# Altium PCB PCB final.PcbDoc
Units mm, origin at the board's own origin, x right, y up, seen from the top; angles counter-clockwise.
Board outline 152.4 x 101.6 mm, 2 copper layers (Top Layer, Bottom Layer); 40 components, 30 nets, 161 pads, 0 vias.
Unrouted connection lines stored in the file: 32.
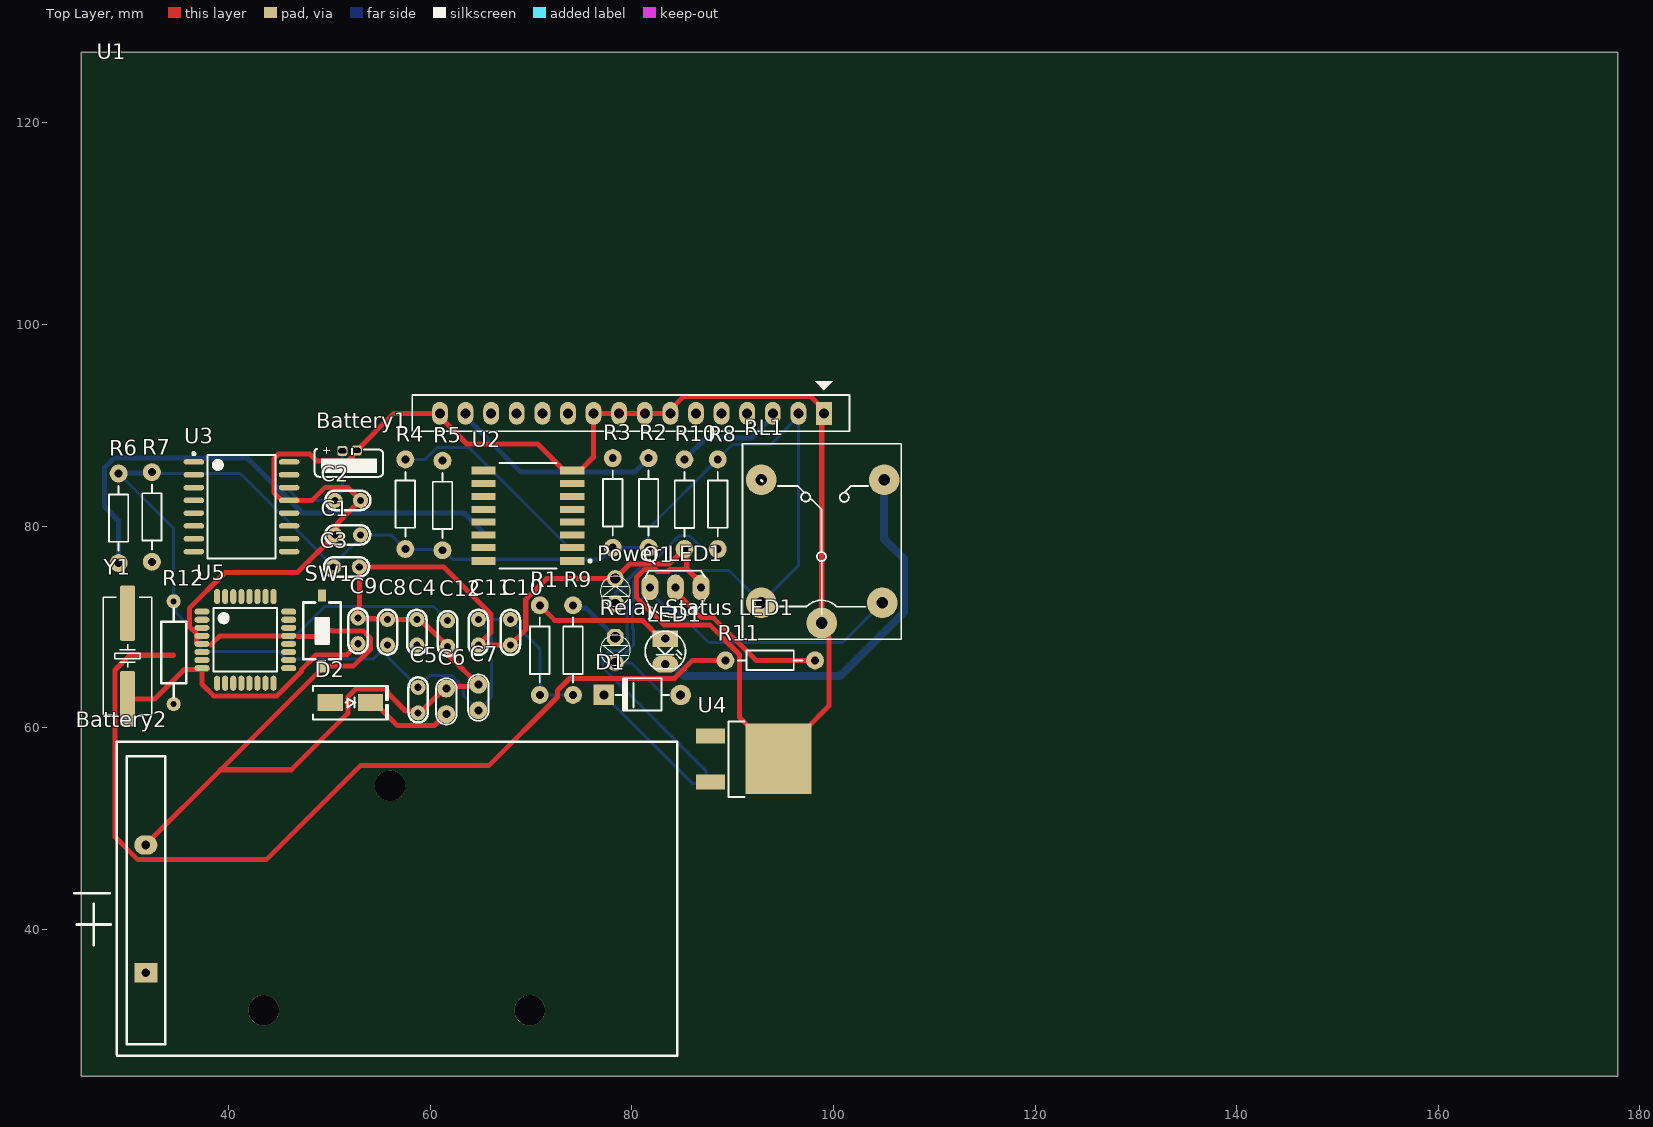
[diagram p0: Top Layer view]
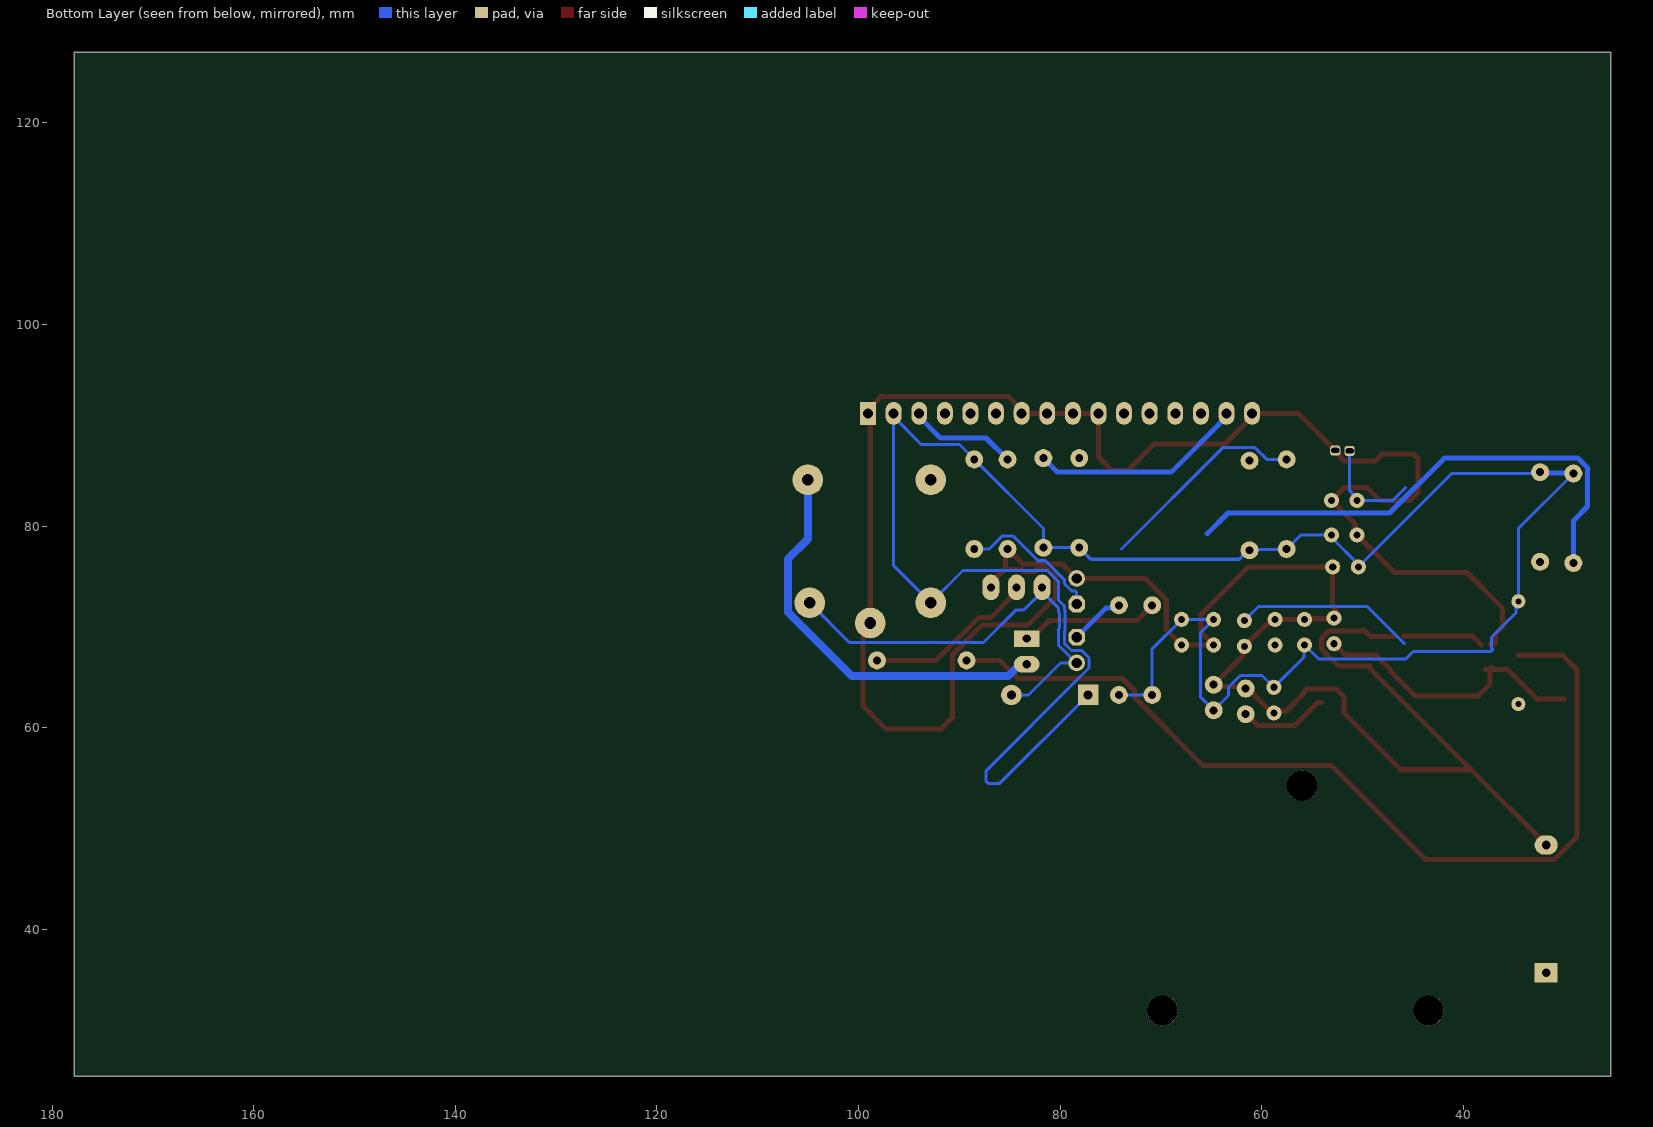
[diagram p1: Bottom Layer view, seen from below]

## Layer stack, top to bottom
Top Solder: solder mask 0.0102, Solder Resist, Dk 3.5
Top Layer: signal copper 0.0356
Dielectric 1: dielectric 0.32, FR-4, Dk 4.8
Bottom Layer: signal copper 0.0356
Bottom Solder: solder mask 0.0102, Solder Resist, Dk 3.5

## Board outline
25.4,25.4 177.8,25.4 177.8,127 25.4,127

## Design rules (kind name [scope] priority, off if disabled: settings)
Clearance [All] p1: gap=0.254 ignorepadtopadclearanceinfootprint=FALSE
PolygonConnect [All] p1: connectstyle=Relief reliefconductorwidth=0.254 reliefentries=4 polygonreliefangle="90 Angle" airgapwidth=0.254
RoutingVias [All] p1: holewidth=0.711 width=1.27 viastyle="Through Hole" minholewidth=0.711 minwidth=1.27 maxholewidth=0.711 maxwidth=1.27
SolderMaskExpansion [All] p1: expansion=0.102 istentingtop=FALSE
SupplyNets "Schematic Supply Nets_1" [InNet('+5')] p1: voltage=0.000
SupplyNets "Schematic Supply Nets" [InNet('GND')] p2: voltage=0.000
Width GND [InNet('GND')] p1: maxlimit=1.6 minlimit=0.5 preferedwidth=1.2
Width Width_1 [All] p2: maxlimit=0.8 minlimit=0.3 preferedwidth=0.5
Width 5V [InNet('+5')] p3: maxlimit=1.6 minlimit=0.5 preferedwidth=1.2
30 further rules are at their usual default settings.

## Components (designator, comment, footprint, x,y, rotation, side; value= is the part's Value field where it differs from the comment)
Battery1 "3V" "PIN 3.6V 20mAh 3/V20H" 51.968,86.639 r90 top value="PIN 3V"
Battery2 "9V" "De Pin 9V" 84.63,58.697 r180 top
C1 "104" "tu gom" 51.816,79.121 r0 top
C2 "104" "tu gom" 51.816,82.55 r180 top
C3 "104" "tu gom" 51.689,75.946 r180 top
C4 "22pF" "tu gom" 58.674,69.469 r90 top
C5 "104" "tu gom" 58.801,62.738 r270 top
C6 "0.33uF" CN1 61.595,63.881 r270 top
C7 "22uF" CN1 64.77,64.262 r270 top
C8 "104" "tu gom" 55.753,69.469 r270 top
C9 "22pF" "tu gom" 52.832,69.596 r270 top
C10 "104" "tu gom" 67.945,69.469 r90 top
C11 "104" "tu gom" 64.77,69.469 r90 top
C12 "104" "tu gom" 61.722,69.342 r90 top
D1 "100v" "DIODE 1A" 86.106,63.246 r0 top
D2 "SS34" "DIODE SMA" 52.07,62.484 r0 top
LED1 "LED 3mm" LED-3MM-WHITE 83.312,68.834 r270 top
"Power LED1" "LED 3mm" LED-3MM-RED 78.359,72.263 r90 top
Q1 "?" TO92 84.328,73.914 r180 top value=C9014
R1 "1k" R1/4W 70.866,72.136 r270 top
R2 "220" R1/4W 81.661,77.851 r90 top
R3 "10k" R1/4W 78.105,77.851 r90 top
R4 "10k" R1/4W 57.531,77.724 r90 top
R5 "10k" R1/4W 61.214,77.597 r90 top
R6 "10k" R1/4W 29.083,76.327 r90 top
R7 "10k" R1/4W 32.385,76.454 r90 top
R8 "1k" R1/4W 88.519,77.724 r90 top
R9 "1k" R1/4W 74.168,72.136 r270 top
R10 "1k" R1/4W 85.217,86.614 r270 top
R11 "1k" R1/4W 98.171,66.675 r180 top
R12 "10k" "tro vach 1/4w" 34.544,67.437 r90 top
"Relay Status LED1" "LED 3mm" LED-3MM-GREEN 78.359,68.961 r270 top
RL1 "Relay" "Relay 5 Chan SRD" 98.837,70.382 r90 top
SW1 "Nut Nhan" "Nut Nhan 2 Chan SMD 3x6x2.5" 49.276,69.596 r90 top
U1 "LCD1602" "LCD1602 with Jump" 99.06,91.186 r180 top
U2 "PCF8574" FP-SOT162-1-MFG 69.678,81.026 r180 top
U3 "DS3231" "SOIC 16" 41.275,81.915 r0 top
U4 "L7805" DPAK_118_446_112X59_SMD 91.821,57.023 r0 top
U5 "ATMEGA328P" TQFP-32 41.656,68.707 r0 top
Y1 "16Mhz" "Thach Anh 2 chan SMD" 29.972,67.115 r90 top value=4Mhz

## Footprints (in the part's own frame and the unit in brackets; to place one, negate y for a bottom-side part, rotate by r counter-clockwise, add the part's x,y. Pads: shape width x height; smd on the part's side, far side on the other; paste and mask are expansions set on the pad)
CN1 [mil]
  round 70 hole 31: 1(0,0) 2(100,0)
  silkscreen extent -40,-40 141,40, body extent -60,-30 170,37, height 265
"De Pin 9V" [mil]
  round 120 hole 120: 0(581.4,1052.4) 0(1126.9,175.9) 0(1620.4,1052.5)
  rect 90x75 hole 34: 1(2080.5,905.75)
  oval 90x75 hole 34: 2(2080.5,407.05)
  silkscreen extent 5,3 2360,1230, body extent 27,20 2173,1210, height 894
"DIODE 1A" [mil] "Diode 1A"
  round 80 hole 35: 1(-50,0)
  rect 80x80 hole 35: 2(-350,0)
  silkscreen extent -305,-61 -95,65, body extent -366,-61 -34,65, height 122
"DIODE SMA" [mm] "SMA"
  rect 2.5x1.7 smd: 1(-2,0) 2(2,0)
  silkscreen extent -3.68,-1.65 3.75,1.65, body extent -2.6,-1.37 2.6,1.37, height 2.4
DPAK_118_446_112X59_SMD [mm] "CASE: DPAK"
  rect 2.85x1.5 smd: 1(-4.023,2.163) 3(-4.023,-2.417)
  rect 6.5x7 smd: 2(2.727,-0.127)
  silkscreen extent -2.22,-3.9 -0.62,3.6, body extent -4.47,-3.43 5.23,3.15, height 2.3
FP-SOT162-1-MFG [mm]
  rect 2.4x0.8 smd paste+0 mask+0: 1(-4.4,4.495) 8(-4.4,-4.495) 9(4.4,-4.495) 16(4.4,4.495)
  rect 2.4x0.7 smd paste+0 mask+0: 2(-4.4,3.175) 3(-4.4,1.905) 4(-4.4,0.635) 5(-4.4,-0.635) 6(-4.4,-1.905) 7(-4.4,-3.175) 10(4.4,-3.175) 11(4.4,-1.905) 12(4.4,-0.635) 13(4.4,0.635) 14(4.4,1.905) 15(4.4,3.175)
  silkscreen extent -6.29,-5.25 2.83,5.25, body extent -5.72,-5.95 5.72,5.95, height 0.25
"LCD1602 with Jump" [mil] "LCD dipslay 16x2, 16 pin"
  rect 62x90 hole 39: 1(0,0)
  oval 62x90 hole 39: 2(100,0) 3(200,0) 4(300,0) 5(400,0) 6(500,0) 7(600,0) 8(700,0) 9(800,0) 10(900,0) 11(1000,0) 12(1100,0) 13(1200,0) 14(1300,0) 15(1400,0) 16(1500,0)
  silkscreen extent -100,-125 1608,70, body extent -320,-1353 2850,84, height 764
LED-3MM-GREEN [mil]
  oct 65x65 hole 40: 1(0,0)
  round 65 hole 40: 2(100,0)
  silkscreen extent -9,-59 109,59, body extent -15,-70 112,60, height 182
LED-3MM-RED [mil]
  oct 65x65 hole 40: 1(0,0)
  round 65 hole 40: 2(100,0)
  silkscreen extent -9,-59 109,59, body extent -27,-77 117,80, height 181
LED-3MM-WHITE [mil] "LED 2 PIN, 3ly Only colour"
  rect 65x100 hole 32: 1(0,0)
  oval 65x100 hole 32: 2(100,0)
  silkscreen extent -29,-78 118,79, body extent -25,-75 113,75, height 217
"Nut Nhan 2 Chan SMD 3x6x2.5" [mm] "Switch SMD type"
  rect 1.2x0.8 smd: 1(-3.5,0) 2(3.5,0)
  silkscreen extent -2.82,-1.85 2.82,1.85, body extent -3.05,-1.85 3.05,1.85, height 2.5
"PIN 3.6V 20mAh 3/V20H" [mm] "batttery"
  rrect50% 1x1 hole 0.5 slot 0.8 at 90 deg unplated: 1(0.813,0.686) 2(0.864,-0.737)
  silkscreen extent -1.75,-3.35 0.99,3.43, body extent -1.74,-3.4 0.96,3.4, height 8.4
R1/4W [mil] "R 1/4W, 2 Pin, 350mil"
  round 70 hole 31: 1(0,0) 2(350,0)
  silkscreen extent 48,-38 302,38, body extent -40,-47 386,47, height 111
"Relay 5 Chan SRD" [mil] "Relay SPDT, 5 pin, 10A,W 650mil, L 800mil, H 800mil"
  round 120 hole 45: 1(0,0) 2(559.06,236.22) 3(559.06,-243.78) 4(78.74,-236.22) 5(78.74,236.22)
  silkscreen extent -63,-311 700,310, body extent -55,-306 697,304, height 602
"SOIC 16" [mm] "SOIC, 16-Leads, Body 10.30x7.50mm, Pitch 1.27mm, IPC Medium Density"
  oval 2.032x0.55 smd: 1(-4.725,4.445) 2(-4.725,3.175) 3(-4.725,1.905) 4(-4.725,0.635) 5(-4.725,-0.635) 6(-4.725,-1.905) 7(-4.725,-3.175) 8(-4.725,-4.445) 9(4.725,-4.445) 10(4.725,-3.175) 11(4.725,-1.905) 12(4.725,-0.635) 13(4.725,0.635) 14(4.725,1.905) 15(4.725,3.175) 16(4.725,4.445)
  silkscreen extent -4.85,-5.15 3.35,5.39, body extent -5.15,-5.17 5.16,5.16, height 2.48
"Thach Anh 2 chan SMD" [mm] "SMD Crystal HC49/US-SM package"
  round 0.508 on Mech15: 0(0,0)
  rrect25% 5.5x1.5 smd: 1(-4.25,0) 2(4.25,0)
  silkscreen extent -5.84,-2.41 5.84,2.41, body extent -6.4,-2.41 6.4,2.42, height 4.29
TO92 [mil] "TO-92"
  oval 66x100 hole 32: 1(-100,0) 2(0,0) 3(100,0)
  silkscreen extent -117,-65 120,118, body extent -109,-66 109,95, height 245
TQFP-32 [mm] "TQFP, 32-Leads, Body 7.10x7.10mm, Pitch 0.80mm, IPC Medium Density"
  oval 1.5x0.6 smd mask+0.076: 1(-4.3,2.8) 2(-4.3,2) 3(-4.3,1.2) 4(-4.3,0.4) 5(-4.3,-0.4) 6(-4.3,-1.2) 7(-4.3,-2) 8(-4.3,-2.8) 17(4.3,-2.8) 18(4.3,-2) 19(4.3,-1.2) 20(4.3,-0.4) 21(4.3,0.4) 22(4.3,1.2) 23(4.3,2) 24(4.3,2.8)
  oval 0.6x1.5 smd mask+0.076: 9(-2.8,-4.3) 10(-2,-4.3) 11(-1.2,-4.3) 12(-0.4,-4.3) 13(0.4,-4.3) 14(1.2,-4.3) 15(2,-4.3) 16(2.8,-4.3) 25(2.8,4.3) 26(2,4.3) 27(1.2,4.3) 28(0.4,4.3) 29(-0.4,4.3) 30(-1.2,4.3) 31(-2,4.3) 32(-2.8,4.3)
  silkscreen extent -3.15,-3.15 3.15,3.15, body extent -4.62,-4.62 4.63,4.63, height 1.2
"tro vach 1/4w" [mm]
  round 1.4 hole 0.6: 1(-5.1,0) 2(5.1,0)
  silkscreen extent -4.39,-1.25 4.42,1.25, body extent -5.38,-1.2 5.38,1.2, height 2.41
"tu gom" [mm] "Tu gom mini"
  round 1.5 hole 0.7: 1(-1.27,0) 2(1.27,0)
  silkscreen extent -2.25,-0.97 2.22,0.97, body extent -2.92,-0.85 2.92,0.85, height 6.12

## Part data
Battery1: library part "PIN 3V", "Battery 3VDC , NI-MH 3.6V 20mAh 3/V20H"
Battery2: library part "De pin 9V cam", "De Pin 9V", Ma_Hang=MH002680, Ten="Hộp Đế Pin 9V Thường"
C1 C2 C3 C5 C8 C10 C11 C12: library part "Tu gom 104 50V", "Cắm", Chung_Loai=Cắm, Don_Vi=Con, Ma_Hang=MH004761, So_Chan=2, Ten_Linh_Kien="Tụ gốm 104 100nF 50V"
C4 C9: library part "Tu gom 22pF 50V", "Cắm", Chung_Loai=Cắm, Don_Vi=Con, Ma_Hang=MH004771, So_Chan=2, Ten_Linh_Kien="Tụ gốm 22P 50V"
C6 C7: library part "CAP gom"
D1: library part "Diode 1N4007", "Cắm", Chung_Loai=Cắm, Don_Vi=Con, Ma_Hang=MH001063, Ten_Linh_Kien="Diode 1N4007 1A (DIP)"
D2: library part "Diode SS34 ( 1N5822 )", "Dán", Chung_Loai=Dán, Don_Vi=Con, Ma_Hang=MH002104, Ten_Linh_Kien="Diode SS34 3A 40V SMA ( 1N5822 SS34A)"
LED1: library part "LED 3mm Trang", "Cắm", Chung_Loai=Cắm, Don_Vi=Con, Ma_Hang=MH009001, Ten_Linh_Kien="LED 3MM Trắng SS (1000c)"
"Power LED1": library part "LED 3mm Do", "Cắm", Chung_Loai=Cắm, Don_Vi=Con, Ma_Hang=MH003892, Ten_Linh_Kien="Led 3MM Phủ Đỏ (10c)"
Q1: library part "Trans 2N3904", "NPN transistor EBC"
R1 R2 R3 R4 R5 R6 R7 R8 R9 R10 R11: library part Res, "Res"
R12: library part "Tro Vach 1/4W 5% 10k", "Căm", Chung_Loai=Cắm, Don_Vi=Con, Ma_Hang=MH007354, So_Chan=2, Ten_Linh_Kien="Trở Vạch 1/4w 5% 10K"
"Relay Status LED1": library part "LED 3mm Xanh La", "Cắm", Chung_Loai=Cắm, Don_Vi=Con, Ma_Hang=MH001054, Ten_Linh_Kien="Led 3MM Phủ Xanh (10c)"
RL1: library part "Relay 5 Chan SRD", "Relay 5 Chan", Ma_Hang=MH009374, Ten="Relay 5V10A SRD-05VDC-SL-C Chính Hãng"
SW1: library part "Nut Nhan 2 Chan SMD 3x6x2.5", "Nut Nhan 2 Chan SMD 3x6x2.5", Ma_Hang=MH001036, Ten="Nút Nhấn 2 Chân 3x6x2.5MM SMD"
U1: library part "LCD1602 XL", "LCD 1602 Xanh Lá", CHIP=HD44780, Ma_Hang=67HZ, NCC=NSHOP, Ten="Màn hình LCD 1602 Xanh Lá"
U2: library part CMP-10112-000010-1, "IC I/O EXPANDER I2C 8B 16SOIC", Ambient Temperature Range High=+85°C, Ambient Temperature Range Low=-40°C, Frequency=100kHz, Manufacturer="NXP Semiconductors", Manufacturer Part Number=PCF8574T/3,518, Max Junction Temp=+125°C, Max Supply Voltage=6V, Min Supply Voltage=2.5V, Nominal Supply Current=40uA, Package=SOT162-1, Temperature="-40°C to +85°C", Automotive=No, Category=IC, ComponentLink2Description=Datasheet, ComponentLink2URL=https://www.nxp.com/docs/en/data-sheet/PCF8574_PCF8574A.pdf, Device Class L1="Integrated Circuits (ICs)", Device Class L2="Interface ICs", Device Class L3="I/O Expanders", Digikey Description="IC I/O EXPANDER I2C 8B 16SOIC", Footprint Url=https://www.nxp.com/docs/en/package-information/SOT162-1.pdf, Height=2.65mm, Interface=I2C, Ipc Land Pattern Name=SOIC127P1032X265-16, Lead Free=Yes, Mouser Description="PCF8574 Series 2.5 - 6V Remote 8-bit I/O Expander for I2C-bus - SOIC-16", Number Of I/Os=8, Octopart=https://octopart.com/pcf8574t%2F3%2C518-nxp+semiconductors-10470852, RoHS=TRUE, Standoff Height=0.1mm, Temperature Range High=+85°C, Temperature Range Low=-40°C
U3: library part "DS3231 SMD", "SOIC"
U4: library part REG_35V_5V-1.5A-7.5W-DPAK, "Linear Voltage Regulator IC 1 Output 1.5A DPAK", Alternate Part Number-1="CJ7805 3%", Case/Package=DPAK, Manufacturer=Diodes, Manufacturer Part Number=L7805CDT-TR, Supplier Part Number-1=L7805CDT-TR, Supplier-1="SP ROAD"
U5: library part IC_ATMEGA328P, "AVR AVR® ATmega Microcontroller IC 8-Bit 20MHz 32KB (16K x 16) FLASH 32-TQFP (7x7)", Alternate Part Number-1=NA, Case/Package=32-TQFP, Manufacturer="Microchip Technology", Manufacturer Part Number=ATMEGA328P-AUR, Supplier Part Number-1=ATMEGA328P-AUR, Supplier-1=Arrow
Y1: library part "Thach Anh 2 chan SMD", "Crystal For all Crystal 2pin."

## Nets (pads, with @x,y where several pads share a name; then routed paths per layer and width w, separated by ;. In a path a pad name is that pad's centre, name@x,y a point inside that pad or via, vN(x,y) a via of type N, cw(c..) or ccw(c..) an arc to the next point about the centre after c; other vN are vias at no path point)
+5: C1.2 C3.2 C5.1 C7.2 C8.2 C10.2 C11.2 D1.2 R1.2 R2.1 R3.1 R4.1 R5.1 R6.2 R7.2 R8.2 R9.2 R12.2 RL1.5 U1.2 U2.16 U3.2 U4.3 U5.4 U5.6 U5.18 | length 235.5
  Bottom Layer w0.3: R6.2 34.544,79.756 R12.2 34.754,72.327 34.754,71.418 37.211,68.961 37.211,67.867 ; R7.2 32.512,85.217 41.148,85.217 C3.2 50.419,76.2 53.086,78.867 C1.2 56.134,79.121 R4.1 57.594,77.66 61.151,77.66 R5.1 61.33,77.597 62.219,76.708 76.962,76.708 R3.1 R2.1 81.661,79.756 R8.2 89.993,88.088 93.777,88.088 U1.2@96.52,90.83 ; 37.084,67.74 37.26,67.564 44.958,67.564 45.72,66.802 54.356,66.802 C8.2 55.81,68.142 55.81,66.999 C5.1 59.967,65.174 62.131,65.174 63.309,63.996 63.309,63.183 C7.2 66.063,63.015 66.063,69.446 C11.2 C10.2 70.866,67.818 R1.2 R9.2 ; D1.2 85.979,54.483 87.157,54.483 87.333,54.659 87.333,55.733 77.947,65.119 77.923,65.119 77.13,65.912 77.13,66.93 77.855,67.656 78.863,67.656 79.588,68.381 79.588,69.541 79.517,69.613 79.517,71.611 79.588,71.683 79.588,72.066 80.142,72.62 80.142,74.457 81.273,75.588 89.631,75.588 RL1.5 96.52,76.065 U1.2@96.52,90.83 ; U1.2 U1.2@96.52,90.83
  Bottom Layer w0.5: R6.2 28.956,85.344 28.956,85.471 29.146,85.281 32.322,85.281 R7.2
A: R2.2 U1.15 | length 21.7
  Bottom Layer w0.5: U1.15@63.373,91.44 63.5,91.313 U1.15 63.5,90.83 68.982,85.348 80.268,85.348 R2.2
AREF: C12.2 U5.20 | length 18
  Bottom Layer w0.3: 45.847,68.326 49.541,72.02 60.314,72.02 C12.2
GND: "Power LED1.2" Battery1.2 Battery2.2 C1.1 C2.1 C3.1 C4.2 C5.2 C6.1 C7.1 C8.1 C9.1 C10.1 C11.1 C12.1 Q1.1 R10.2 RL1.1 SW1.1 U1.1 U1.7 U1.8 U1.9 U1.10 U1.16 U2.8 U3.13 U4.2 U5.3 U5.5 U5.21 | length 322.7
  Top Layer w0.5: Battery2.2 31.786,48.406 39.203,55.823 ; U5.5 36.933,68.307 36.83,68.41 36.83,69.303 36.102,70.031 36.102,71.84 39.647,75.385 46.81,75.385 C1.1 50.737,79.312 50.737,80.201 C2.1 51.832,83.804 49.542,83.804 48.288,82.55 U3.13 45.616,82.55 45.259,82.55 44.48,83.329 44.48,86.683 44.936,87.139 48.045,87.139 48.736,86.448 51.845,86.448 52.287,86.89 52.287,87.085 Battery1.2 56.388,91.186 U1.16 60.96,90.83 63.643,88.148 70.651,88.148 73.278,85.521 U2.8 74.878,85.521 76.2,86.843 U1.10 U1.9 U1.8 U1.7 83.82,91.542 85.111,92.833 97.769,92.833 99.06,91.542 U1.1 98.837,90.963 RL1.1 98.837,69.693 99.564,68.966 99.564,62.162 97.251,59.849 91.845,59.849 90.674,61.02 90.674,67.252 87.762,70.163 83.209,70.163 80.446,72.926 80.446,74.902 81.232,75.688 82.344,75.688 82.535,75.497 83.581,75.497 83.772,75.688 85.526,75.688 Q1.1@86.868,74.346 ; 38.239,68.211 39.135,69.107 U5.21 ; 46.813,69.038 49.226,69.038 49.831,69.643 50.245,69.643 50.308,69.58 53.351,69.58 54.086,68.845 54.086,67.807 52.375,66.096 SW1.1 49.276,65.896 39.203,55.823 ; 52.578,71.628 52.959,72.009 C3.1 61.336,75.946 66.024,71.258 66.024,69.453 C11.1 C10.1 69.473,69.727 69.473,72.713 71.563,74.803 78.359,74.803 79.807,76.251 83.744,76.251 R10.2 85.447,77.494 85.447,75.767 Q1.1@86.868,74.346 ; C9.1 52.895,70.802 55.689,70.802 C8.1 C4.2 58.945,70.739 59.502,70.182 59.612,70.182 C12.1 61.913,67.881 61.913,67.119 C7.1 64.579,64.072 61.785,64.072 C6.1 61.404,63.881 58.991,61.468 C5.2 58.61,61.659 57.543,61.659 55.824,63.379 55.824,63.543 55.529,63.838 52.611,63.838 51.824,63.051 51.824,61.425 46.222,55.823 39.203,55.823 ; Q1.1@86.868,74.346 Q1.1 Q1.1@86.868,74.346
NetBattery1_1: Battery1.1 C2.2 U3.14 | length 10.6
  Bottom Layer w0.3: 45.72,83.82 46.99,82.55 C2.2 50.546,82.774 51.283,83.51 Battery1.1
NetBattery2_1: Battery2.1 D2.1
NetC4_1: C4.1 U5.7 Y1.2
NetC6_2: C6.2 D2.2 U4.1 | length 9
  Top Layer w0.5: D2.2 54.47,62.484 56.74,60.214 60.404,60.214 61.531,61.341 C6.2 C6.2@61.648,61.288
NetC9_2: C9.2 U5.8 Y1.1 | length 29.1
  Top Layer w0.5: Y1.1 32.699,62.865 35.62,65.786 U5.8@37.846,65.786 ; U5.8@37.084,65.903 37.314,65.903 37.356,65.861 37.356,64.32 38.523,63.153 44.789,63.153 47.21,65.574 47.21,65.743 48.667,67.2 51.706,67.2 C9.2
NetD1_1: "Relay Status LED1.2" D1.1 Q1.3 RL1.4 | length 44
  Bottom Layer w0.3: D1.1 83.133,63.246 79.958,66.421 78.359,66.421 78.412,66.421 80.142,68.151 80.142,69.771 80.071,69.842 80.071,71.382 80.142,71.453 80.142,71.837 Q1.3@81.788,73.482 ; RL1.4 100.909,68.454 87.599,68.454 84.367,71.686 83.584,71.686 Q1.3@81.788,73.482 ; Q1.3@81.788,73.482 Q1.3 Q1.3@81.788,73.482
NetLED1_1: LED1.1 R1.1 | length 13.8
  Top Layer w0.5: R1.1 72.352,70.65 81.051,70.65 82.867,68.834 LED1.1
"NetPower LED1_1": "Power LED1.1" R8.1 | length 14.4
  Bottom Layer w0.3: 78.359,72.263 78.359,73.398 78.535,73.574 78.868,73.574 79.588,74.294 79.588,74.687 81.46,76.558 82.197,76.558 84.656,79.017 85.753,79.017 87.046,77.724 R8.1
NetQ1_2: Q1.2 R11.1 | length 17.1
  Top Layer w0.5: Q1.2 84.328,73.482 86.893,70.917 88.075,70.917 92.317,66.675 R11.1
NetR3_2: R3.2 U2.3
NetR4_2: R4.2 U2.2 | length 21
  Bottom Layer w0.3: R4.2 59.512,86.614 60.678,87.78 63.858,87.78 73.914,77.724
NetR5_2: R5.2 U2.1
NetR9_1: "Relay Status LED1.1" R9.1 | length 5.5
  Bottom Layer w0.5: R9.1 74.413,71.891 75.429,71.891 78.359,68.961
NetR10_1: R10.1 U1.3 | length 10.9
  Bottom Layer w0.5: R10.1 87.345,88.742 91.891,88.742 93.98,90.83 U1.3
NO: LED1.2 RL1.3 | length 40.7
  Bottom Layer w0.8: LED1.2 83.987,66.294 85.149,65.132 100.667,65.132 107.015,71.48 107.015,76.734 105.029,78.72 RL1.3
P0: U1.4 U2.4
P1: U1.5 U2.5
P2: U1.6 U2.6
P4: U1.11 U2.9
P5: U1.12 U2.10
P6: U1.13 U2.11
P7: U1.14 U2.12
PD6: R11.2 U5.10 | length 93
  Top Layer w0.5: 34.544,67.183 30.187,67.183 28.718,65.714 28.718,49.175 30.992,46.901 43.742,46.901 53.097,56.257 65.847,56.257 72.632,63.042 72.632,63.68 73.821,64.869 84.211,64.869 86.018,66.675 R11.2
RST: R12.1 SW1.2 U3.4 U5.29
SCL: R6.1 U2.14 U3.16 U5.28 | length 51.3
  Bottom Layer w0.5: R6.1 29.083,80.537 27.69,81.93 27.69,85.794 28.633,86.737 41.878,86.737 47.319,81.296 63.357,81.296 65.405,79.248
SDA: R7.1 U2.15 U3.15 U5.27
pads on no net: Battery2.0 RL1.2 U2.7 U2.13 U3.1 U3.3 U3.5 U3.6 U3.7 U3.8 U3.9 U3.10 U3.11 U3.12 U5.1 U5.2 U5.9 U5.11 U5.12 U5.13 U5.14 U5.15 U5.16 U5.17 U5.19 U5.22 U5.23 U5.24 U5.25 U5.26 U5.30 U5.31 U5.32 Y1.0

## Text inside footprints (layer, text, board x,y; h text height)
Battery1: Top Overlay "+" at 50.072,87.018 h0.8 r90; Top Overlay "-" at 53.019,86.868 h2 r90